# Altium PCB classyTKL_EC.PcbDoc (part 1 of 2)
Units mm, origin at the board's own origin, x right, y up, seen from the top; angles counter-clockwise.
Board outline 346.59 x 122.85 mm, 4 copper layers (Top Layer, Int1, Int2, Bottom Layer), stack 1.369 mm thick; 156 components, 68 nets, 789 pads, 1245 vias.
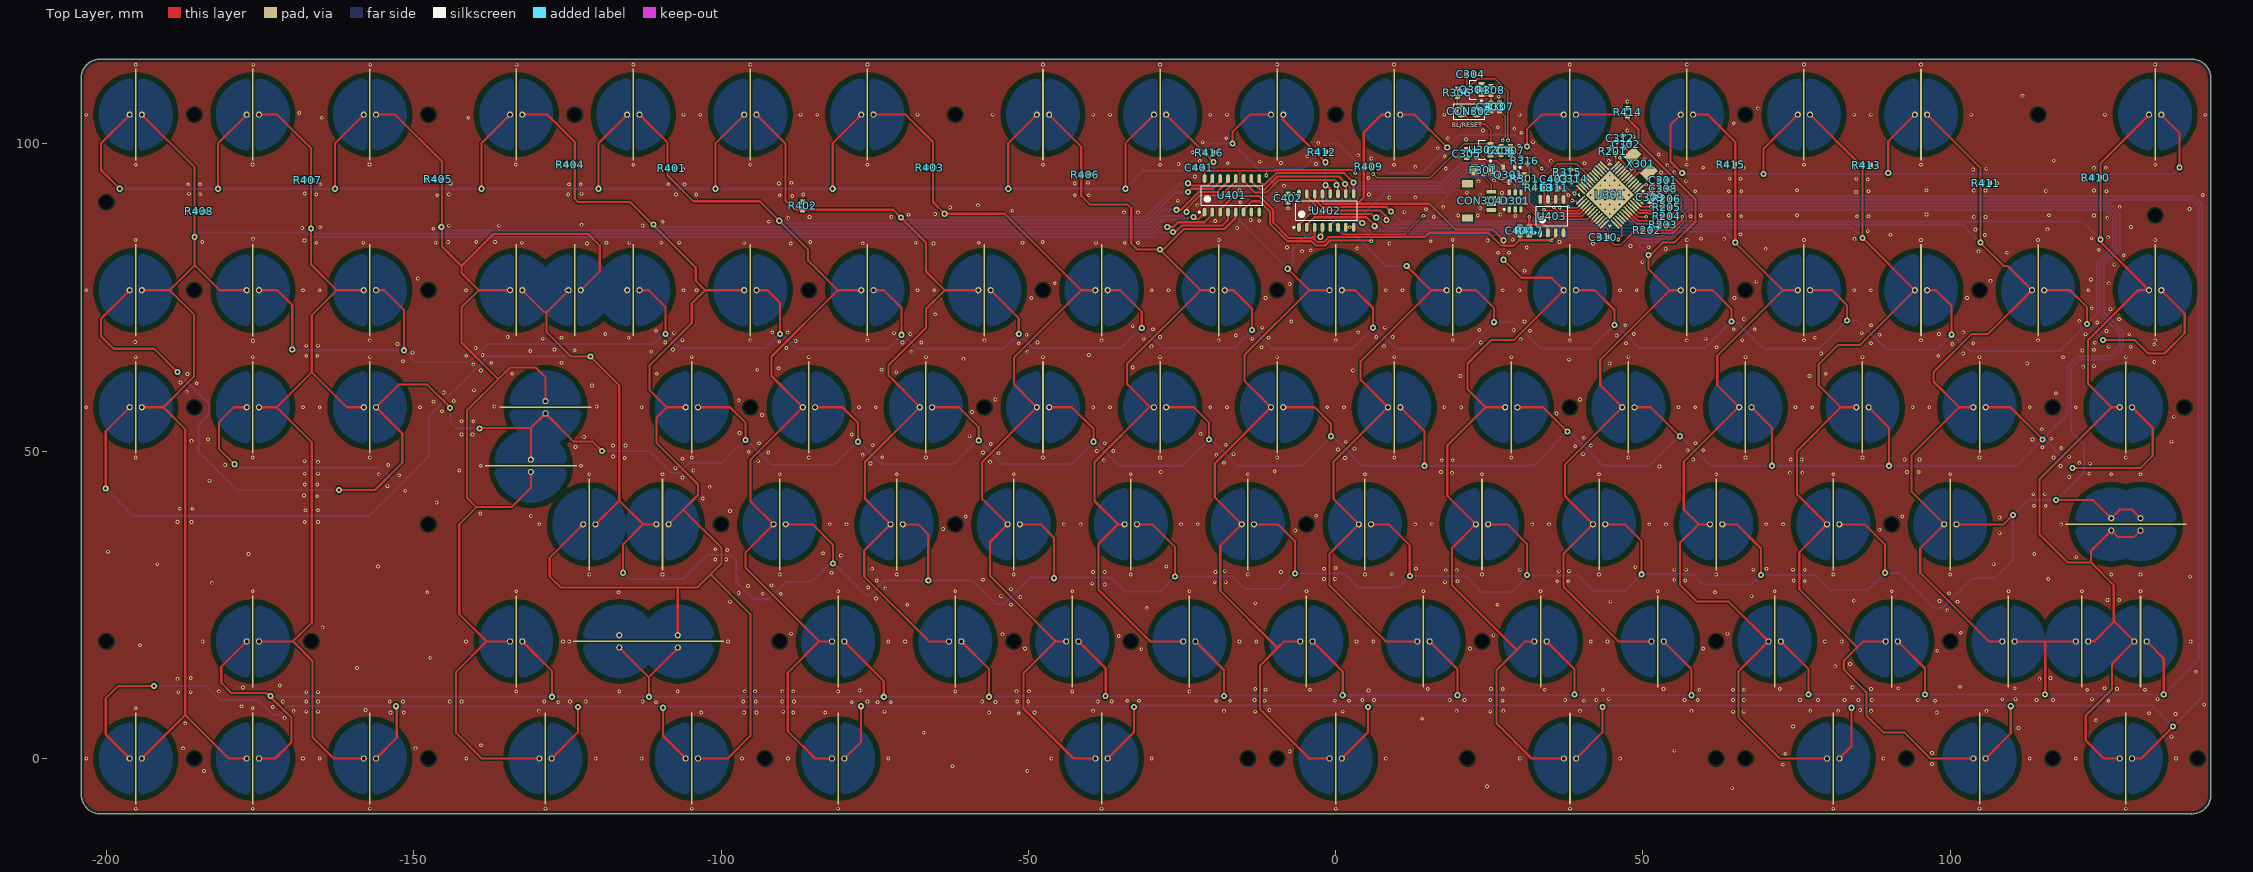
[diagram p0: Top Layer view]
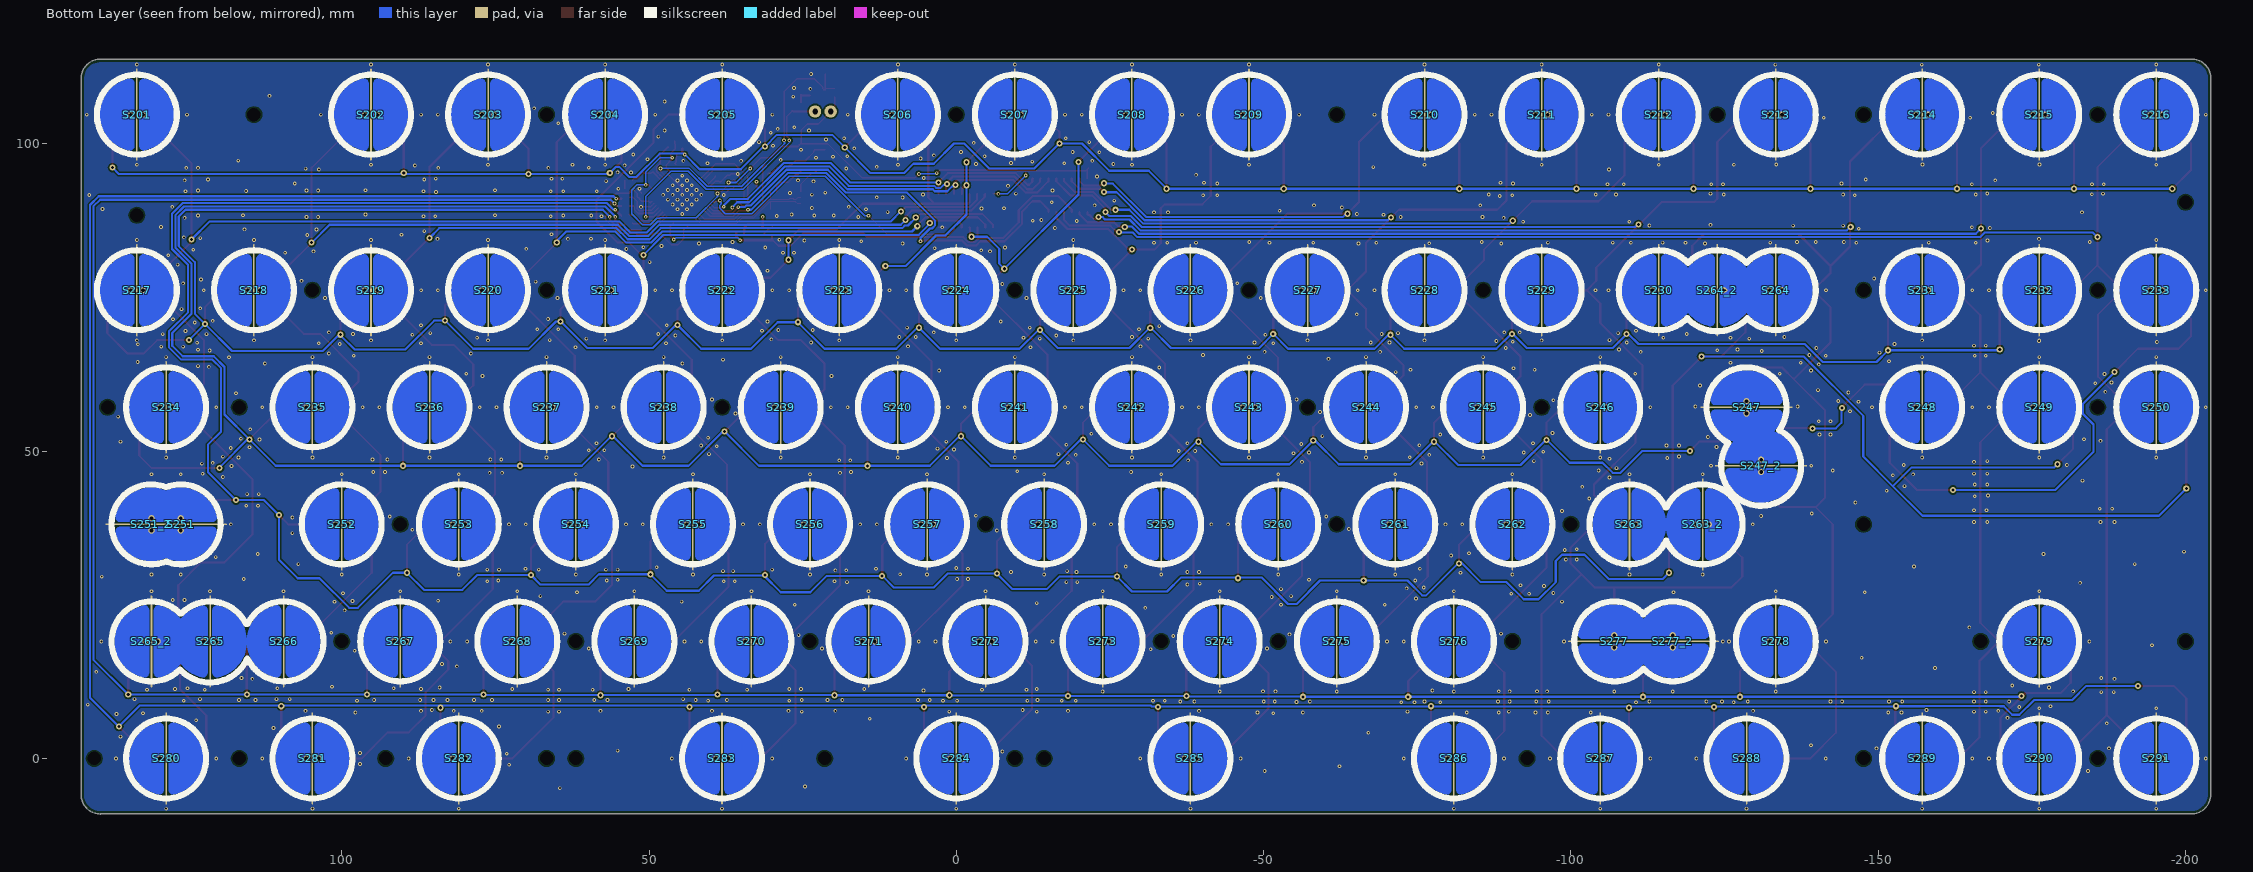
[diagram p1: Bottom Layer view, seen from below]
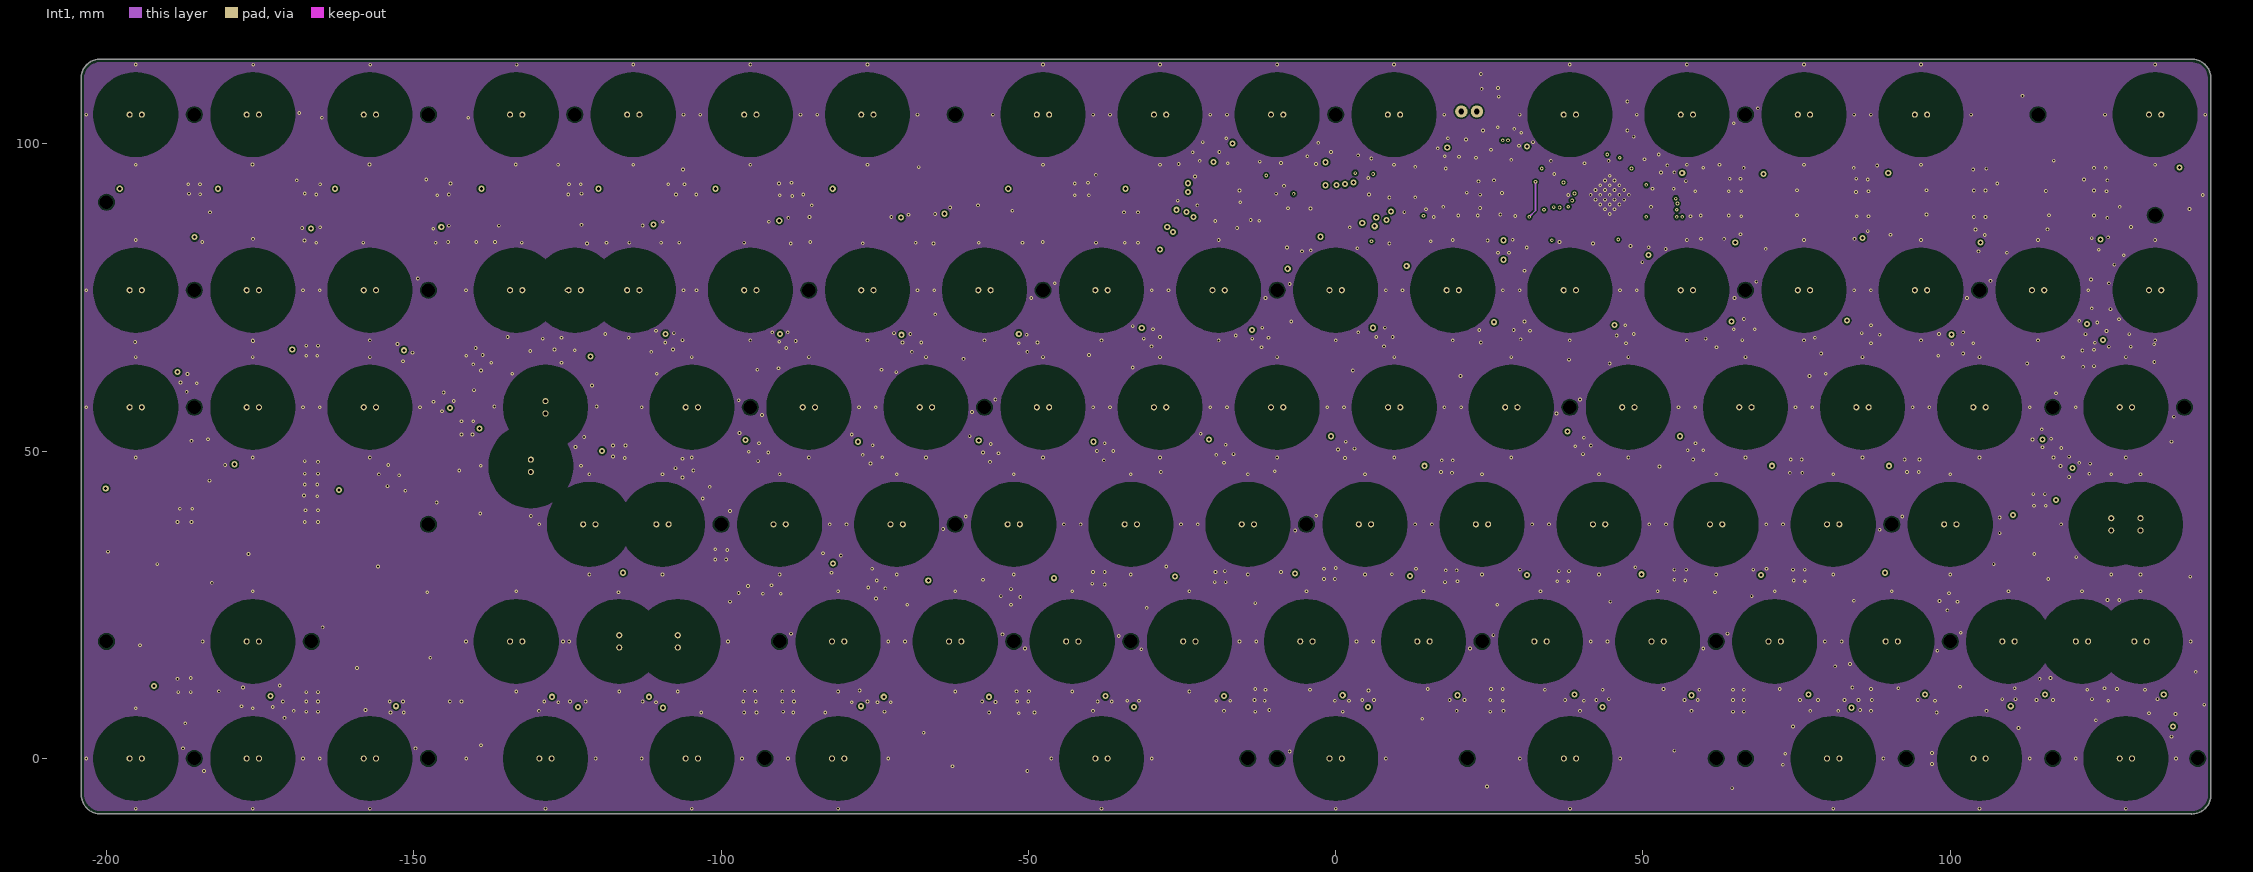
[diagram p2: Int1]
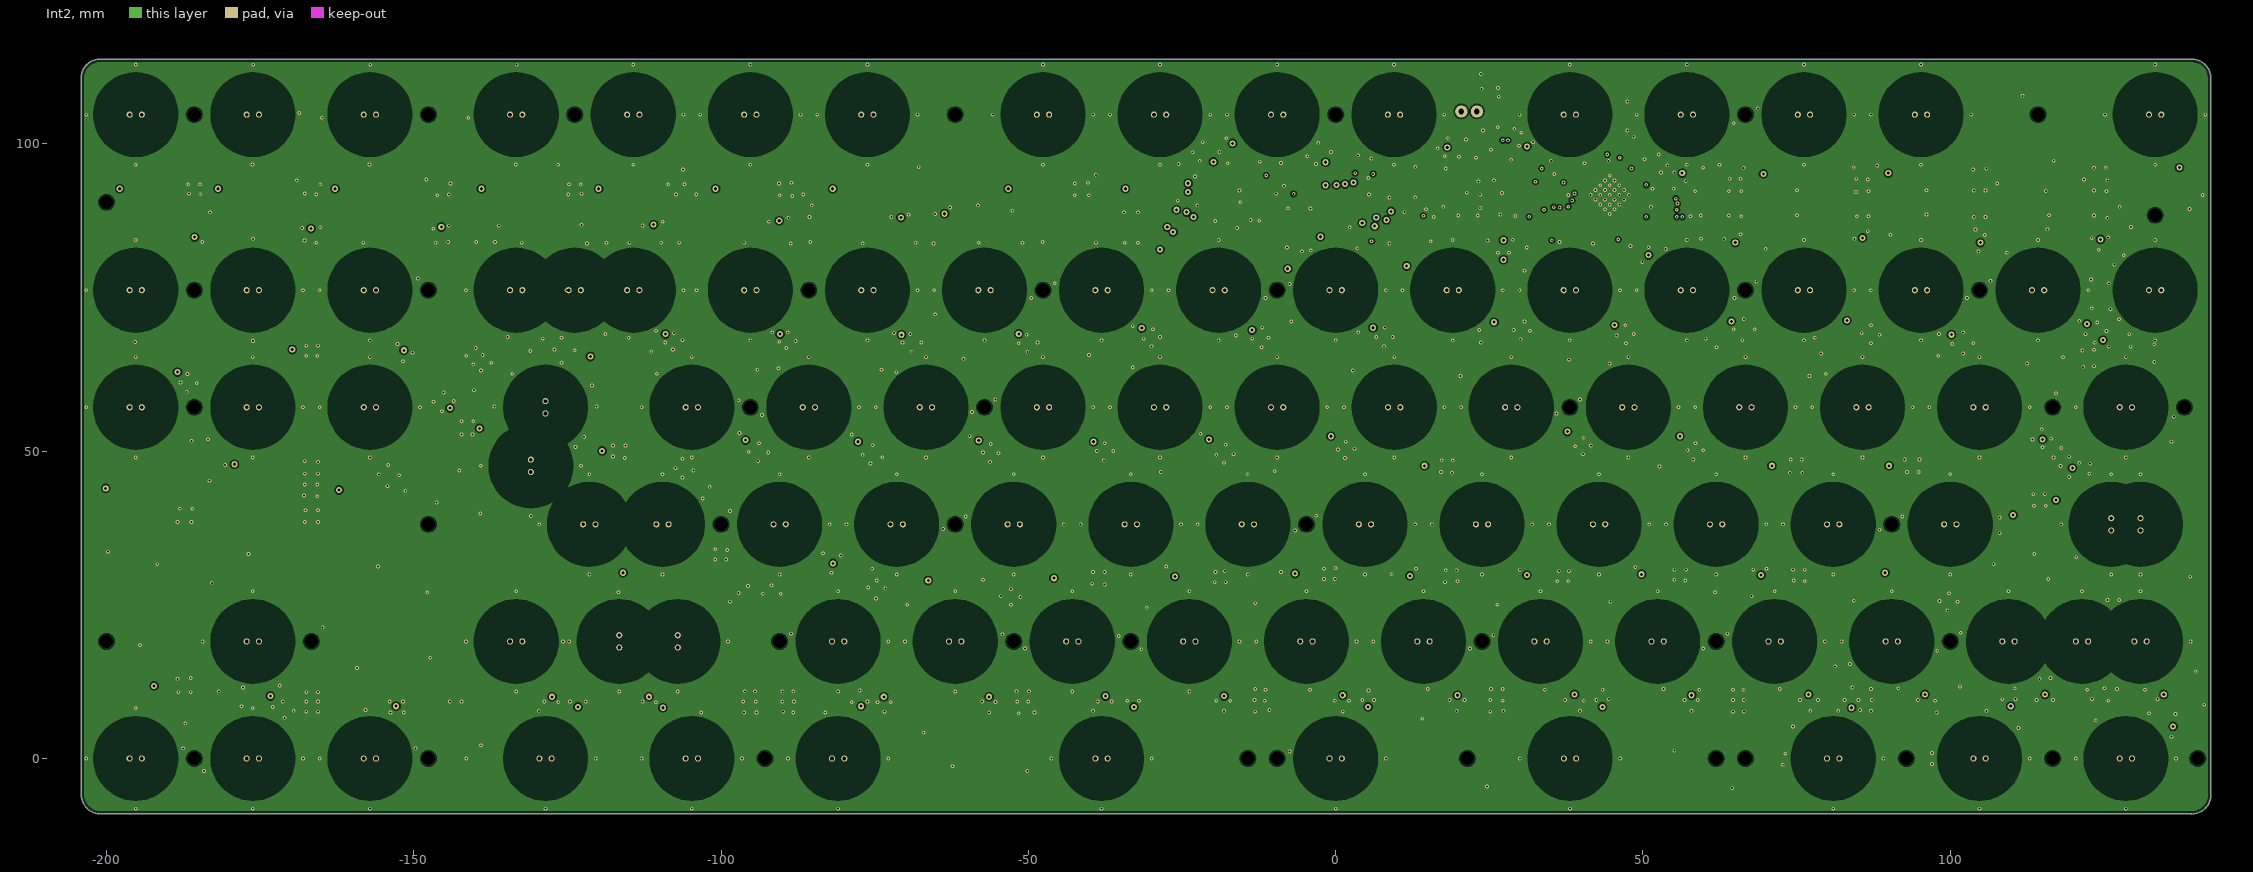
[diagram p3: Int2]

## Layer stack, top to bottom
Top Solder: solder mask 0.0254, SM-001, Dk 4
Top Layer: signal copper 0.035
Dielectric 1: prepreg 0.1295, PP-017, Dk 4.3
Dielectric 2: prepreg 0.1295, PP-017, Dk 4.3
Int1: signal copper 0.035
Dielectric 3: core 0.7112, Core-039, Dk 4.8
Int2: signal copper 0.035
Dielectric 4: prepreg 0.1295, PP-017, Dk 4.3
Dielectric 5: prepreg 0.1295, PP-017, Dk 4.3
Bottom Layer: signal copper 0.035
Bottom Solder: solder mask 0.0254, SM-001, Dk 4

## Board outline
-204.127,-5.981 cw(c-204.032,-5.896) -204.159,-5.896 -204.159,110.685 cw(c-201.032,110.685) -201.032,113.812 cw(c-201.032,113.685) -200.974,113.798 139.295,113.798 cw(c139.295,110.671) 142.423,110.671 142.423,-5.883 cw(c142.299,-5.915) 142.427,-5.915 cw(c139.299,-5.915) 139.299,-9.042 cw(c139.299,-8.915) 139.233,-9.023 -201,-9.023 cw(c-201,-5.896)

## Design rules (kind name [scope] priority, off if disabled: settings)
BoardOutlineClearance [All] p1: gap=0.5 ignorepadtopadclearanceinfootprint=FALSE
Clearance [All] p1: gap=0.2 ignorepadtopadclearanceinfootprint=FALSE except(0: Arc-Hole Track-Hole SMDPad-Hole THPad-Hole Via-Hole Fill-Hole Poly-Hole Region-Hole Text-Hole; 0.254: THPad-THPad THPad-Via THPad-Fill THPad-Poly THPad-Region THPad-Text Via-Via Via-Fill Via-Poly Via-Region Via-Text Fill-Fill Fill-Poly Fill-Region Fill-Text Poly-Poly Poly-Region Poly-Text Region-Region Region-Text Text-Text)
ComponentClearance [InComponent('No Component') And OnLayer('Component Side')] p1: gap=0.254 collisioncheckmode=3 verticalgap=0.254 showdistances=FALSE
DiffPairsRouting DiffPairsRouting_USB [InDifferentialPairClass('All Differential Pairs')] p1: maxlimit=0.254 minlimit=0.203 mostfreqgap=0.203 toplayer_minwidth=0.152 toplayer_maxwidth=0.381 toplayer_prefwidth=0.152 midlayer1_minwidth=0.152 midlayer1_maxwidth=0.381 midlayer1_prefwidth=0.152 midlayer2_minwidth=0.152 midlayer2_maxwidth=0.381 midlayer2_prefwidth=0.152 bottomlayer_minwidth=0.152 bottomlayer_maxwidth=0.381 bottomlayer_prefwidth=0.152 maxuncoupledlength=12.7
DiffPairsRouting [All] p2: maxlimit=0.254 minlimit=0.254 mostfreqgap=0.254 toplayer_minwidth=0.381 toplayer_maxwidth=0.381 toplayer_prefwidth=0.381 midlayer1_minwidth=0.381 midlayer1_maxwidth=0.381 midlayer1_prefwidth=0.381 midlayer2_minwidth=0.381 midlayer2_maxwidth=0.381 midlayer2_prefwidth=0.381 bottomlayer_minwidth=0.381 bottomlayer_maxwidth=0.381 bottomlayer_prefwidth=0.381 maxuncoupledlength=12.7
HoleSize [All] p1: absolutevalues=TRUE maxlimit=20 minlimit=0.025 maxpercent=80.000 minpercent=20.000
MatchedLengths MatchedLengths_USB_DiffPairs_1 [All] p1: tolerance=0.127 checknetsindiffpair=TRUE checkdiffpairvsdiffpair=FALSE checkxsignals=FALSE checkothers=FALSE
MatchedLengths MatchedLengths_USB_DiffPairs [All] p2: tolerance=0.127 checknetsindiffpair=TRUE checkdiffpairvsdiffpair=FALSE checkxsignals=FALSE checkothers=FALSE
PolygonConnect PolygonConnect_1 [All vs IsVia] p1: connectstyle=Direct reliefconductorwidth=0.254 reliefentries=4 polygonreliefangle="90 Angle" airgapwidth=0.254
PolygonConnect [All] p2: connectstyle=Relief reliefconductorwidth=0.254 reliefentries=4 polygonreliefangle="90 Angle" airgapwidth=0.254
RoutingVias [All] p1: holewidth=0.711 width=1.27 viastyle="Through Hole" minholewidth=0.711 minwidth=1.27 maxholewidth=0.711 maxwidth=1.27
SolderMaskExpansion [All] p1: expansion=0.102 istentingtop=FALSE
Width [All] p1: maxlimit=3 minlimit=0.203 preferedwidth=0.254 minimp=50.000000 maximp=50.000000 favimp=50.000000
27 further rules are at their usual default settings.

## Classes and differential pairs
component class 1_classyTKL_EC_top: R201 R202 R203 R204 R205 R206
component class Designator: C201 C202 C203 C204 C205 C206 S201 S202 S203 S204 S205 S206 S207 S208 S209 S210 S211 S212 S213 S214 S215 S216 S217 S218 S219 S220 S221 S222 S223 S224 S225 S226 S227 S228 S229 S230 S231 S232 S233 S234 S235 S236 S237 S238 S239 S240 S241 S242 S243 S244 S245 S246 S247 S247_2 S248 S249 S250 S251 S251_2 S252 S253 S254 S255 S256 S257 S258 S259 S260 S261 S262 S263 S263_2 S264 S264_2 S265 S265_2 S266 S267 S268 S269 S270 S271 S272 S273 S274 S275 S276 S277 S277_2 S278 S279 S280 S281 S282 S283 S284 S285 S286 S287 S288 S289 S290 S291
differential pair D: +D_P -D_N

## Components (designator, comment, footprint, x,y, rotation, side; value= is the part's Value field where it differs from the comment)
C301 "" C0603[1608] 53.34,94.107 r180 top value=30pF
C302 "" C0603[1608] 47.292,99.929 r225 top value=30pF
C303 "" C0603[1608] 25.273,106.045 r90 top value=4.7uF
C304 "" C0603[1608] 21.971,111.379 r0 top value=470nF
C305 "" C0603[1608] 21.336,98.425 r90 top value=1uF
C306 "" C0603[1608] 26.924,98.933 r90 top value=1uF
C307 "" C0603[1608] 28.448,98.933 r90 top value=4,7uF
C308 "" C0603[1608] 53.34,92.71 r180 top value=0.1uF
C309 "" C0603[1608] 51.181,91.313 r270 top value=0.1uF
C310 "" C0603[1608] 43.561,84.836 r0 top value=0.1uF
C311 "" C0603[1608] 35.56,92.837 r180 top value=0.1uF
C312 "" C0603[1608] 46.276,100.945 r225 top value=0.1uF
C314 "" C0603[1608] 38.735,94.361 r45 top value=4,7uF
C401 "" C0603[1608] -22.225,96.139 r0 top value=0.1uF
C402 "" C0603[1608] -7.747,91.186 r90 top value=0.1uF
C403 "" C0603[1608] 35.56,94.234 r180 top value=0.1uF
C404 "" C0603[1608] 29.972,85.852 r270 top value=220pF
CON302 "Header 2" HDR1X2 22.987,105.283 r180 top value=DNP
CON304 "Header 5" "JST SM04B-SRSS-TB" 21.468,93.54 r270 top locked
D301 "SRV05" SOT-23-6 29.215,90.734 r90 top
F301 "Fuse Thermal" C1206[3216] 24.003,95.758 r180 top
Q301 "PMOS-2" SOT-23-3#1 28.194,94.996 r270 top
Q304 "NMOS" SOT-23-3#2 22.536,108.839 r0 top
R201 "Res1" R0603[1608] 45.085,98.806 r135 top value=100R
R202 "Res1" R0603[1608] 50.673,85.979 r0 top value=100R
R203 "Res1" R0603[1608] 53.34,86.868 r0 top value=100R
R204 "Res1" R0603[1608] 53.848,88.265 r0 top value=100R
R205 "Res1" R0603[1608] 53.848,89.662 r0 top value=100R
R206 "Res1" R0603[1608] 53.848,91.059 r0 top value=100R
R301 "Res1" R0603[1608] 30.734,94.361 r270 top value=10K
R306 "Res1" R0603[1608] 19.812,108.331 r90 top value=10K
R307 "Res1" R0603[1608] 26.67,106.045 r90 top value=10K
R308 "Res1" R0603[1608] 25.273,108.727 r90 top value=100K
R315 "Res1" R0603[1608] 37.719,95.377 r225 top value=10K
R316 "Res1" R0603[1608] 30.734,97.282 r315 top value=51K
R401 "Res1" R0603[1608] -108.077,96.012 r0 top value=100K
R402 "Res1" R0603[1608] -86.741,89.916 r90 top value=100K
R403 "Res1" R0603[1608] -66.04,96.139 r180 top value=100K
R404 "Res1" R0603[1608] -124.587,96.647 r180 top value=100K
R405 "Res1" R0603[1608] -146.05,94.234 r180 top value=100K
R406 "Res1" R0603[1608] -40.767,94.996 r0 top value=100K
R407 "Res1" R0603[1608] -167.259,94.107 r180 top value=100K
R408 "Res1" R0603[1608] -184.912,89.027 r0 top value=100K
R409 "Res1" R0603[1608] 5.349,96.266 r0 top value=100K
R410 "Res1" R0603[1608] 123.698,94.488 r180 top value=100K
R411 "Res1" R0603[1608] 105.791,93.599 r0 top value=100K
R412 "Res1" R0603[1608] -2.286,98.679 r0 top value=100K
R413 "Res1" R0603[1608] 86.36,96.52 r0 top value=100K
R414 "Res1" R0603[1608] 47.498,105.156 r90 top value=100K
R415 "Res1" R0603[1608] 64.262,96.647 r180 top value=100K
R416 "Res1" R0603[1608] -20.574,98.552 r0 top value=100K
R417 "Res1" R0603[1608] 31.496,85.852 r270 top value=1K
R418 "Res1" R0603[1608] 33.02,92.837 r0 top value=100K
S201 "SW-PB-3" TOPRE 133.349,104.775 r90 bottom locked value=DNP
S202 "SW-PB-3" TOPRE 95.249,104.775 r270 bottom locked value=DNP
S203 "SW-PB-3" TOPRE 76.199,104.775 r270 bottom locked value=DNP
S204 "SW-PB-3" TOPRE 57.149,104.775 r270 bottom locked value=DNP
S205 "SW-PB-3" TOPRE 38.099,104.775 r270 bottom locked value=DNP
S206 "SW-PB-3" TOPRE 9.494,104.775 r90 bottom locked value=DNP
S207 "SW-PB-3" TOPRE -9.526,104.775 r270 bottom locked value=DNP
S208 "SW-PB-3" TOPRE -28.576,104.775 r270 bottom locked value=DNP
S209 "SW-PB-3" TOPRE -47.626,104.775 r270 bottom locked value=DNP
S210 "SW-PB-3" TOPRE -76.201,104.775 r270 bottom locked value=DNP
S211 "SW-PB-3" TOPRE -95.251,104.775 r270 bottom locked value=DNP
S212 "SW-PB-3" TOPRE -114.301,104.775 r270 bottom locked value=DNP
S213 "SW-PB-3" TOPRE -133.351,104.775 r270 bottom locked value=DNP
S214 "SW-PB-3" TOPRE -157.162,104.775 r270 bottom locked value=DNP
S215 "SW-PB-3" TOPRE -176.213,104.775 r270 bottom locked value=DNP
S216 "SW-PB-3" TOPRE -195.263,104.775 r270 bottom locked value=DNP
S217 "SW-PB-3" TOPRE 133.349,76.2 r90 bottom locked value=DNP
S218 "SW-PB-3" TOPRE 114.299,76.2 r90 bottom locked value=DNP
S219 "SW-PB-3" TOPRE 95.249,76.2 r90 bottom locked value=DNP
S220 "SW-PB-3" TOPRE 76.199,76.2 r90 bottom locked value=DNP
S221 "SW-PB-3" TOPRE 57.149,76.2 r90 bottom locked value=DNP
S222 "SW-PB-3" TOPRE 38.099,76.2 r90 bottom locked value=DNP
S223 "SW-PB-3" TOPRE 19.049,76.2 r90 bottom locked value=DNP
S224 "SW-PB-3" TOPRE -0.001,76.2 r90 bottom locked value=DNP
S225 "SW-PB-3" TOPRE -19.051,76.2 r90 bottom locked value=DNP
S226 "SW-PB-3" TOPRE -38.101,76.2 r90 bottom locked value=DNP
S227 "SW-PB-3" TOPRE -57.151,76.2 r90 bottom locked value=DNP
S228 "SW-PB-3" TOPRE -76.201,76.2 r90 bottom locked value=DNP
S229 "SW-PB-3" TOPRE -95.251,76.2 r90 bottom locked value=DNP
S230 "SW-PB-3" TOPRE -114.301,76.2 r90 bottom locked value=DNP
S231 "SW-PB-3" TOPRE -157.162,76.2 r90 bottom locked value=DNP
S232 "SW-PB-3" TOPRE -176.213,76.2 r90 bottom locked value=DNP
S233 "SW-PB-3" TOPRE -195.263,76.2 r270 bottom locked value=DNP
S234 "SW-PB-3" TOPRE 128.587,57.15 r90 bottom locked value=DNP
S235 "SW-PB-3" TOPRE 104.774,57.15 r90 bottom locked value=DNP
S236 "SW-PB-3" TOPRE 85.724,57.15 r90 bottom locked value=DNP
S237 "SW-PB-3" TOPRE 66.674,57.15 r90 bottom locked value=DNP
S238 "SW-PB-3" TOPRE 47.624,57.15 r90 bottom locked value=DNP
S239 "SW-PB-3" TOPRE 28.574,57.15 r90 bottom locked value=DNP
S240 "SW-PB-3" TOPRE 9.524,57.15 r90 bottom locked value=DNP
S241 "SW-PB-3" TOPRE -9.526,57.15 r90 bottom locked value=DNP
S242 "SW-PB-3" TOPRE -28.576,57.15 r90 bottom locked value=DNP
S243 "SW-PB-3" TOPRE -47.626,57.15 r90 bottom locked value=DNP
S244 "SW-PB-3" TOPRE -66.676,57.15 r90 bottom locked value=DNP
S245 "SW-PB-3" TOPRE -85.726,57.15 r90 bottom locked value=DNP
S246 "SW-PB-3" TOPRE -104.776,57.15 r90 bottom locked value=DNP
S247 "SW-PB-3" TOPRE -128.588,57.15 r0 bottom locked value=DNP
S247_2 "SW-PB-3" TOPRE -130.969,47.625 r180 bottom locked value=DNP
S248 "SW-PB-3" TOPRE -157.162,57.15 r90 bottom locked value=DNP
S249 "SW-PB-3" TOPRE -176.213,57.15 r270 bottom locked value=DNP
S250 "SW-PB-3" TOPRE -195.263,57.15 r270 bottom locked value=DNP
S251 "SW-PB-3" TOPRE 126.206,38.1 r180 bottom locked value=DNP
S251_2 "SW-PB-3" TOPRE 130.968,38.1 r180 bottom locked value=DNP
S252 "SW-PB-3" TOPRE 100.012,38.1 r90 bottom locked value=DNP
S253 "SW-PB-3" TOPRE 80.962,38.1 r90 bottom locked value=DNP
S254 "SW-PB-3" TOPRE 61.912,38.1 r90 bottom locked value=DNP
S255 "SW-PB-3" TOPRE 42.862,38.1 r90 bottom locked value=DNP
S256 "SW-PB-3" TOPRE 23.812,38.1 r90 bottom locked value=DNP
S257 "SW-PB-3" TOPRE 4.762,38.1 r90 bottom locked value=DNP
S258 "SW-PB-3" TOPRE -14.288,38.1 r90 bottom locked value=DNP
S259 "SW-PB-3" TOPRE -33.338,38.1 r90 bottom locked value=DNP
S260 "SW-PB-3" TOPRE -52.388,38.1 r90 bottom locked value=DNP
S261 "SW-PB-3" TOPRE -71.438,38.1 r90 bottom locked value=DNP
S262 "SW-PB-3" TOPRE -90.488,38.1 r90 bottom locked value=DNP
S263 "SW-PB-3" TOPRE -109.544,38.1 r270 bottom locked value=DNP
S263_2 "SW-PB-3" TOPRE -121.451,38.1 r90 bottom locked value=DNP
S264 "SW-PB-3" TOPRE -133.351,76.2 r90 bottom locked value=DNP
S264_2 "SW-PB-3" TOPRE -123.826,76.2 r270 bottom locked value=DNP
S265 "SW-PB-3" TOPRE 121.443,19.05 r270 bottom locked value=DNP
S265_2 "SW-PB-3" TOPRE 130.968,19.05 r90 bottom locked value=DNP
S266 "SW-PB-3" TOPRE 109.479,19.05 r90 bottom locked value=DNP
S267 "SW-PB-3" TOPRE 90.487,19.05 r90 bottom locked value=DNP
S268 "SW-PB-3" TOPRE 71.437,19.05 r90 bottom locked value=DNP
S269 "SW-PB-3" TOPRE 52.387,19.05 r90 bottom locked value=DNP
S270 "SW-PB-3" TOPRE 33.337,19.05 r90 bottom locked value=DNP
S271 "SW-PB-3" TOPRE 14.287,19.05 r90 bottom locked value=DNP
S272 "SW-PB-3" TOPRE -4.763,19.05 r90 bottom locked value=DNP
S273 "SW-PB-3" TOPRE -23.813,19.05 r90 bottom locked value=DNP
S274 "SW-PB-3" TOPRE -42.862,19.05 r90 bottom locked value=DNP
S275 "SW-PB-3" TOPRE -61.913,19.05 r90 bottom locked value=DNP
S276 "SW-PB-3" TOPRE -80.963,19.05 r90 bottom locked value=DNP
S277 "SW-PB-3" TOPRE -107.056,19.05 r0 bottom locked value=DNP
S277_2 "SW-PB-3" TOPRE -116.581,19.05 r0 bottom locked value=DNP
S278 "SW-PB-3" TOPRE -133.351,19.05 r90 bottom locked value=DNP
S279 "SW-PB-3" TOPRE -176.213,19.05 r270 bottom locked value=DNP
S280 "SW-PB-3" TOPRE 128.587,0 r90 bottom locked value=DNP
S281 "SW-PB-3" TOPRE 104.775,0 r90 bottom locked value=DNP
S282 "SW-PB-3" TOPRE 80.962,0 r90 bottom locked value=DNP
S283 "SW-PB-3" TOPRE 38.132,0 r90 bottom locked value=DNP
S284 "SW-PB-3" TOPRE 0,0 r90 bottom locked value=DNP
S285 "SW-PB-3" TOPRE -38.1,0 r90 bottom locked value=DNP
S286 "SW-PB-3" TOPRE -80.962,0 r90 bottom locked value=DNP
S287 "SW-PB-3" TOPRE -104.775,0 r270 bottom locked value=DNP
S288 "SW-PB-3" TOPRE -128.588,0 r90 bottom locked value=DNP
S289 "SW-PB-3" TOPRE -157.163,0 r90 bottom locked value=DNP
S290 "SW-PB-3" TOPRE -176.213,0 r90 bottom locked value=DNP
S291 "SW-PB-3" TOPRE -195.263,0 r270 bottom locked value=DNP
U301 "STM32F4 - 48PIN" "STM32 - COMBO 7X7MM" 44.604,91.715 r135 top
U302 "XC6206P332MR" SOT-23-3#2 24.003,99.06 r0 top
U401 "74HC4051" Texas_Instruments_D_SOIC16 -16.891,91.636 r90 top
U402 "74HC4051" Texas_Instruments_D_SOIC16 -1.524,89.154 r90 top
U403 "OPA350" SOIC-8 35.179,88.265 r0 top
X301 "XTAL" "CTS 445-series crystal" 49.657,96.774 r135 top value=8MHz

## Footprints (in the part's own frame and the unit in brackets; to place one, negate y for a bottom-side part, rotate by r counter-clockwise, add the part's x,y. Pads: shape width x height; smd on the part's side, far side on the other; paste and mask are expansions set on the pad)
C0603[1608] [mm] "Chip Resistor, 2-Leads, Body 1,57x0,80mm, IPC Medium Density"
  rect 0.8x0.85 smd: 1(-0.65,0) 2(0.65,0)
  body extent -0.83,-0.43 0.82,0.43, height 0.5
C1206[3216] [mm]
  rect 1.2x1.8 smd: 1(-1.35,0) 2(1.35,0)
  silkscreen extent -0.35,-0.8 0.35,0.8, body extent -1.6,-0.9 1.6,0.9, height 1.2
"CTS 445-series crystal" [mm]
  rect 1.8x2.4 smd: 1(-1.9,0) 2(1.9,0)
  body extent -2.5,-1.6 2.5,1.6, height 1.3
HDR1X2 [mm] "Connector; Header; 2 Position"
  round 2 hole 0.9 mask+0.102: 1(0,0) 2(2.54,0)
  silkscreen extent -1.27,-1.27 3.81,1.27
"JST SM04B-SRSS-TB" [mm]
  rect 0.6x1.55 smd: 1(1.3,3.875) 2(2.3,3.875) 3(3.3,3.875) 4(4.3,3.875)
  rect 1.2x1.8 smd: 5(0,0) 5(5.6,0)
  body extent -0.21,-0.76 5.79,4.19, height 3.25
R0603[1608] [mm] "Chip Resistor, 2-Leads, Body 1,57x0,80mm, IPC Medium Density"
  rect 0.8x0.85 smd: 1(-0.65,0) 2(0.65,0)
  body extent -0.83,-0.43 0.82,0.43, height 0.5
SOIC-8 [mm] "Based on AT24C256C datasheet"
  oval 0.6x1.45 smd: 1(-1.905,-2.725) 2(-0.635,-2.725) 3(0.635,-2.725) 4(1.905,-2.725) 5(1.905,2.725) 6(0.635,2.725) 7(-0.635,2.725) 8(-1.905,2.725)
  silkscreen extent -2.88,-2.85 2.55,1.6, body extent -2.55,-3 2.55,3, height 1.75
SOT-23-3#1 [mm] "3.3v regulator, used in Windsond S2 proto 1"
  rect 1x0.55 smd: 1(-1.2,0.95) 2(-1.2,-0.95) 3(1.2,0)
  silkscreen extent -1.32,-1.55 0.7,1.95, body extent -1.45,-1.5 1.1,1.5, height 1
SOT-23-3#2 [mm] "3.3v regulator, used in Windsond S2 proto 1"
  rect 1x0.55 smd: 1(1.2,-0.95) 2(1.2,0.95) 3(-1.2,0)
  silkscreen extent -0.7,-1.95 1.33,1.55, body extent -1.1,-1.5 1.45,1.5, height 1
SOT-23-6 [mm]
  rect 1x0.55 smd: 1(-1.375,0.95) 2(-1.375,0) 3(-1.375,-0.95) 4(1.375,-0.95) 5(1.375,0) 6(1.375,0.95)
  silkscreen extent -1.5,-1.55 0.46,1.92, body extent -1.37,-1.44 1.47,1.49, height 1.05
"STM32 - COMBO 7X7MM" [mm] "LQFP48, 7x7mm"
  oval 0.3x1.45 smd paste-5: 1(-2.75,-4.225) 2(-2.25,-4.225) 3(-1.75,-4.225) 4(-1.25,-4.225) 5(-0.75,-4.225) 6(-0.25,-4.225) 7(0.25,-4.225) 8(0.75,-4.225) 9(1.25,-4.225) 10(1.75,-4.225) 11(2.25,-4.225) 12(2.75,-4.225) 25(2.75,4.225) 26(2.25,4.225) 27(1.75,4.225) 28(1.25,4.225) 29(0.75,4.225) 30(0.25,4.225) 31(-0.25,4.225) 32(-0.75,4.225) 33(-1.25,4.225) 34(-1.75,4.225) 35(-2.25,4.225) 36(-2.75,4.225)
  oval 0.25x0.8 smd: 1(-2.75,-3.4) 2(-2.25,-3.4) 3(-1.75,-3.4) 4(-1.25,-3.4) 5(-0.75,-3.4) 6(-0.25,-3.4) 7(0.25,-3.4) 8(0.75,-3.4) 9(1.25,-3.4) 10(1.75,-3.4) 11(2.25,-3.4) 12(2.75,-3.4) 25(2.75,3.4) 26(2.25,3.4) 27(1.75,3.4) 28(1.25,3.4) 29(0.75,3.4) 30(0.25,3.4) 31(-0.25,3.4) 32(-0.75,3.4) 33(-1.25,3.4) 34(-1.75,3.4) 35(-2.25,3.4) 36(-2.75,3.4)
  oval 0.8x0.25 smd: 13(3.4,-2.75) 14(3.4,-2.25) 15(3.4,-1.75) 16(3.4,-1.25) 17(3.4,-0.75) 18(3.4,-0.25) 19(3.4,0.25) 20(3.4,0.75) 21(3.4,1.25) 22(3.4,1.75) 23(3.4,2.25) 24(3.4,2.75) 37(-3.4,2.75) 38(-3.4,2.25) 39(-3.4,1.75) 40(-3.4,1.25) 41(-3.4,0.75) 42(-3.4,0.25) 43(-3.4,-0.25) 44(-3.4,-0.75) 45(-3.4,-1.25) 46(-3.4,-1.75) 47(-3.4,-2.25) 48(-3.4,-2.75)
  oval 1.45x0.3 smd paste-5: 13(4.225,-2.75) 14(4.225,-2.25) 15(4.225,-1.75) 16(4.225,-1.25) 17(4.225,-0.75) 18(4.225,-0.25) 19(4.225,0.25) 20(4.225,0.75) 21(4.225,1.25) 22(4.225,1.75) 23(4.225,2.25) 24(4.225,2.75) 37(-4.225,2.75) 38(-4.225,2.25) 39(-4.225,1.75) 40(-4.225,1.25) 41(-4.225,0.75) 42(-4.225,0.25) 43(-4.225,-0.25) 44(-4.225,-0.75) 45(-4.225,-1.25) 46(-4.225,-1.75) 47(-4.225,-2.25) 48(-4.225,-2.75)
  rect 5.6x5.6 smd: 47(0,0)
  silkscreen extent -3.65,-4.35 3.65,3.65, body extent -4.5,-4.5 4.5,4.5, height 1.5
Texas_Instruments_D_SOIC16 [mm]
  oval 1.45x0.6 smd: 1(-2.725,4.445) 2(-2.725,3.175) 3(-2.725,1.905) 4(-2.725,0.635) 5(-2.725,-0.635) 6(-2.725,-1.905) 7(-2.725,-3.175) 8(-2.725,-4.445) 9(2.725,-4.445) 10(2.725,-3.175) 11(2.725,-1.905) 12(2.725,-0.635) 13(2.725,0.635) 14(2.725,1.905) 15(2.725,3.175) 16(2.725,4.445)
  silkscreen extent -2.85,-5 1.6,5.42, body extent -3,-5 3,5, height 1.75
TOPRE [mm]
  round 1 hole 0.6 mask+0: 1(0,1) 2(0,-1)
  oval 15x0.25 smd far side paste-1 mask+0: 3(0,0)
  oval 15x0.25 smd paste-1 mask+0: 3(0,0)
  round 1 on Mech14: ""(0,0)
  Top Layer region: -5.259,0.414 -5.17,0.398 -5.08,0.393 -5.08,0.393 5.08,0.393 5.17,0.398 5.259,0.414 5.259,0.414 5.568,0.556 5.782,0.819 5.859,1.149 5.859,1.149 5.854,1.232 5.841,1.314 5.841,1.314 4.688,3.723 2.603,5.391 0,5.987 -2.603,5.391 -4.688,3.723 -5.841,1.314 -5.841,1.314 -5.847,1.018 -5.739,0.742 -5.532,0.53 -5.259,0.414
  Top Layer region: -5.841,-1.314 -4.688,-3.723 -2.603,-5.391 0,-5.987 2.603,-5.391 4.688,-3.723 5.841,-1.314 5.841,-1.314 5.854,-1.232 5.859,-1.149 5.859,-1.149 5.782,-0.819 5.568,-0.556 5.259,-0.414 5.259,-0.414 5.17,-0.398 5.08,-0.393 5.08,-0.393 -5.08,-0.393 -5.17,-0.398 -5.259,-0.414 -5.259,-0.414 -5.532,-0.53 -5.739,-0.742 -5.847,-1.018 -5.841,-1.314
  Top Layer pour cut-out: 0,-6.884 -2.634,-6.36 -4.868,-4.868 -6.36,-2.634 -6.884,0 -6.884,0 -6.36,2.634 -4.868,4.868 -2.634,6.36 0,6.884 0,6.884 2.634,6.36 4.868,4.868 6.36,2.634 6.884,0 6.884,0 6.36,-2.634 4.868,-4.868 2.634,-6.36 0,-6.884
  Int1 pour cut-out: 0,-6.884 -2.634,-6.36 -4.868,-4.868 -6.36,-2.634 -6.884,0 -6.884,0 -6.36,2.634 -4.868,4.868 -2.634,6.36 0,6.884 0,6.884 2.634,6.36 4.868,4.868 6.36,2.634 6.884,0 6.884,0 6.36,-2.634 4.868,-4.868 2.634,-6.36 0,-6.884
  Int2 pour cut-out: 0,-6.884 -2.634,-6.36 -4.868,-4.868 -6.36,-2.634 -6.884,0 -6.884,0 -6.36,2.634 -4.868,4.868 -2.634,6.36 0,6.884 0,6.884 2.634,6.36 4.868,4.868 6.36,2.634 6.884,0 6.884,0 6.36,-2.634 4.868,-4.868 2.634,-6.36 0,-6.884
  Bottom Layer pour cut-out: 0,-6.884 -2.634,-6.36 -4.868,-4.868 -6.36,-2.634 -6.884,0 -6.884,0 -6.36,2.634 -4.868,4.868 -2.634,6.36 0,6.884 0,6.884 2.634,6.36 4.868,4.868 6.36,2.634 6.884,0 6.884,0 6.36,-2.634 4.868,-4.868 2.634,-6.36 0,-6.884
  Bottom Layer pour cut-out: -6.51,0 -6.015,-2.487 -4.606,-4.596 -2.497,-6.005 -0.01,-6.5 -0.01,-6.5 2.477,-6.005 4.586,-4.596 5.995,-2.487 6.49,0 6.49,0 5.995,2.487 4.586,4.596 2.477,6.005 -0.01,6.5 -0.01,6.5 -2.497,6.005 -4.606,4.596 -6.015,2.487 -6.51,0
  silkscreen extent -6.5,-6.5 6.5,6.5

## Part data
C301 C302: library part Cap, "Capacitor", LCSC MFG="Samsung Electro-Mechanics", LCSC Part #=C22397, MRF.Part=CL10C300JB8NNNC, Version="0603 imperial"
C303 C307 C314: library part Cap, "Capacitor", LCSC MFG="Samsung Electro-Mechanics", LCSC Part #=C19666, MRF.Part=CL10A475KO8NNNC, Version="0603 imperial"
C304 C308 C309 C310 C311 C312 C401 C402 C403: library part Cap, "Capacitor", LCSC MFG=YAGEO, LCSC Part #=C14663, MRF.Part=CC0603KRX7R9BB104, Version="0603 imperial"
C305 C306: library part Cap, "Capacitor", LCSC MFG="Samsung Electro-Mechanics", LCSC Part #=C15849, MRF.Part=CL10A105KB8NNNC, Version="0603 imperial"
C404: library part Cap, "Capacitor", LCSC MFG="Samsung Electro-Mechanics", LCSC Part #=C1603, MRF.Part=CL10B221KB8NNNC, Version="0603 imperial"
CON302: "Header, 2-Pin", LCSC MFG=DNP
CON304: "JST for USB daughter board", LCSC MFG="JST Sales America", LCSC Part #=C160404, MRF.Part=SM04B-SRSS-TB(LF)(SN)
D301: LCSC MFG="ProTek Devices", LCSC Part #=C85364, MRF.Part=SRV05-4-P-T7
F301: "Thermal Fuse", LCSC MFG="Shenzhen JDT Fuse", LCSC Part #=C135338, MRF.Part=ASMD1206-050
Q301: "P-Channel Power MOSFET", LCSC MFG="Vishay Intertech", LCSC Part #=C10487, MRF.Part=SI2301CDS-T1-GE3, Version=SOT23-3
Q304: library part MOSFET-N, "N-Channel MOSFET", LCSC MFG="Changjiang Electronics Tech (CJ)", LCSC Part #=C8545, MRF.Part=2N7002
R201 R202 R203 R204 R205 R206 R308 R401 R402 R403 R404 R405 R406 R407 R408 R409 R410 R411 R412 R413 R414 R415 R416 R418: "Resistor", LCSC MFG="Uniroyal Elec", LCSC Part #=C25803, MRF.Part=0603WAF1003T5E, Version="0603 imperial"
R301 R306 R307 R315: "Resistor", LCSC MFG="Uniroyal Elec", LCSC Part #=C25804, MRF.Part=0603WAF1002T5E, Version="0603 imperial"
R316: "Resistor", LCSC MFG="UNI-ROYAL(Uniroyal Elec)", LCSC Part #=C23196, MRF.Part=0603WAF5102T5E, Version="0603 imperial"
R417: "Resistor", LCSC MFG="UNI-ROYAL(Uniroyal Elec)", LCSC Part #=C21190, MRF.Part=0603WAF1001T5E, Version="0603 imperial"
S201 S202 S203 S204 S205 S206 S207 S208 S209 S210 S211 S212 S213 S214 S215 S216 S217 S218 S219 S220 S221 S222 S223 S224 S225 S226 S227 S228 S229 S230 S231 S232 S233 S234 S235 S236 S237 S238 S239 S240 S241 S242 S243 S244 S245 S246 S247 S247_2 S248 S249 S250 S251 S251_2 S252 S253 S254 S255 S256 S257 S258 S259 S260 S261 S262 S263 S263_2 S264 S264_2 S265 S265_2 S266 S267 S268 S269 S270 S271 S272 S273 S274 S275 S276 S277 S277_2 S278 S279 S280 S281 S282 S283 S284 S285 S286 S287 S288 S289 S290 S291: "Switch", LCSC MFG=DNP
U301: LCSC MFG=STMicroelectronics, LCSC Part #=C60420, MRF.Part=STM32F411CEU6
U302: library part "SOT23 LDO", LCSC MFG="Torex Semicon", LCSC Part #=C5446, MRF.Part=XC6206P332MR
U401 U402: LCSC MFG=Nexperia, LCSC Part #=C9386, MRF.Part=74HC4051D,653
U403: LCSC MFG="Texas Instruments", LCSC Part #=C13388, MRF.Part=OPA350UA/2K5
X301: "Crystal Oscillator", LCSC MFG="Yangxing Tech", LCSC Part #=C115962, MRF.Part=X50328MSB2GI, Version=SMD-5032_2P

## Free pads (board coordinates)
  round 1.152 hole 2.2 unplated paste+0.148 mask+0.148: ""(-200.027,19.05) ""(-200.025,90.505) ""(-185.739,0) ""(-185.739,57.15) ""(-185.739,76.2) ""(-185.737,104.775) ""(-166.689,19.05) ""(-147.639,0) ""(-147.638,76.2) ""(-147.638,104.775) ""(-147.638,38.1) ""(-123.826,104.775) ""(-100.014,38.1) ""(-95.251,57.15) ""(-92.87,0) ""(-90.489,19.05) ""(-85.726,76.2) ""(-61.914,38.1) ""(-61.914,104.775) ""(-57.151,57.15) ""(-52.388,19.05) ""(-47.626,76.2) ""(-33.338,19.05) ""(-14.288,0) ""(-9.526,0) ""(-9.526,76.2) ""(-4.763,38.1) ""(-0.001,104.775) ""(21.431,0) ""(23.812,19.05) ""(38.1,57.15) ""(61.912,0) ""(61.912,19.05) ""(66.674,104.775) ""(66.675,0) ""(66.675,76.2) ""(90.487,38.1) ""(92.869,0) ""(100.012,19.05) ""(104.775,76.2) ""(114.3,104.775) ""(116.681,57.15) ""(116.681,0) ""(133.349,88.392) ""(138.111,57.15) ""(140.275,0)

## Via types
v1: diameter 0.6, hole 0.3, Top Layer to Bottom Layer, tented both sides, 1092 vias
v2: diameter 1, hole 0.5, Top Layer to Bottom Layer, tented both sides, 128 vias
v3: diameter 0.6, hole 0.3, Top Layer to Bottom Layer, tented bottom, 25 vias

## Nets (pads, with @x,y where several pads share a name; then routed paths per layer and width w, separated by ;. In a path a pad name is that pad's centre, name@x,y a point inside that pad or via, vN(x,y) a via of type N, cw(c..) or ccw(c..) an arc to the next point about the centre after c; other vN are vias at no path point)
BOOT0: C303.1 CON302.1 R307.1 U301.44 | length 44.9
  Top Layer w0.254: CON302.1@22.987,105.283 26.558,105.283 R307.1@26.67,105.395 26.695,105.395 26.968,105.122 26.968,105.097 27.578,104.487 27.578,101.238 27.244,100.904 27.244,100.65 v1(27.178,100.584) ; U301.44@48.122,89.258 49.242,88.138 v1(50.546,88.138)
  Bottom Layer w0.254: v1@27.051,100.323 34.729,92.645 40.709,92.645 43.622,95.558 46.428,95.558 50.546,91.44 v1(50.546,88.138)
col1: R410.1 S201.2 S217.2 S234.2 S251.2 S251_2.2 S265.2 S265_2.2 S280.2 U402.14 | length 290.8
  Top Layer w0.35: U402.14@-3.429,91.879 -3.381,91.831 -3.381,90.914 -3.097,90.629 -2.196,89.729 8.269,89.729 8.971,89.027 v2(9.017,89.027) ; S265.2@122.443,19.05 122.469,19.075 123.468,19.075 126.619,22.226 126.619,22.399 ; S280.2@127.587,0 124.968,0 122.047,2.921 122.047,6.985 126.34,11.278 126.34,15.422 S265_2.2@129.968,19.05 126.619,22.399 ; S234.2@127.587,57.15 126.238,57.15 ; S251_2.2@130.968,37.1 129.936,36.068 127.238,36.068 S251.2@126.206,37.1 122.936,33.83 122.936,31.877 ; S201.2@132.349,104.775 124.46,96.886 v2(124.46,84.455) 124.584,84.331 124.584,83.965 S217.2@132.349,76.2 130.556,76.2 122.428,68.072 122.428,60.96 126.238,57.15 ; 122.936,31.877 126.619,28.194 126.619,22.399 ; 122.936,31.877 119.126,31.877 114.554,36.449 114.554,45.466 126.238,57.15
  Bottom Layer w0.35: v2(9.017,89.027) 10.641,87.403 48.55,87.403 50.356,85.597 53.038,85.597 54.844,87.403 121.512,87.403 v2(124.46,84.455)
col2: R411.1 S202.2 S218.2 S235.2 S252.2 S266.2 U402.15 | length 234.6
  Top Layer w0.35: U402.15@-4.699,91.879 -4.617,91.797 -4.617,91.372 -2.424,89.179 7.23,89.179 8.297,88.112 8.297,87.656 v2@8.009,87.368 ; S202.2@96.25,104.775 104.902,96.123 v2(104.902,83.947) 108.713,80.136 109.364,80.136 S218.2@113.299,76.2 106.187,69.088 103.505,69.088 97.282,62.865 97.282,61.341 101.473,57.15 ; S235.2@103.774,57.15 101.473,57.15 ; S266.2@108.479,19.05 106.299,19.05 95.123,30.226 95.123,34.211 S252.2@99.012,38.1 93.726,43.386 93.726,49.403 101.473,57.15
  Bottom Layer w0.35: v2(8.255,87.63) 9.032,86.853 48.322,86.853 50.128,85.047 53.265,85.047 55.071,86.853 101.996,86.853 v2(104.902,83.947)
col3: R413.1 S203.2 S219.2 S236.2 S253.2 S267.2 S281.2 U402.1 | length 251.9
  Top Layer w0.35: U402.1@-5.969,86.429 -5.969,86.854 -4.194,88.629 5.81,88.629 6.428,88.011 v2(6.604,88.011) ; S203.2@77.2,104.775 85.725,96.25 85.725,84.724 S219.2@94.249,76.2 85.359,67.31 81.788,67.31 78.613,64.135 78.613,60.734 82.197,57.15 ; S236.2@84.724,57.15 82.197,57.15 ; S267.2@89.487,19.05 85.852,19.05 84.9,18.098 ; S281.2@103.775,0 96.774,0 92.519,4.255 89.09,4.255 86.36,6.985 86.36,10.795 82.677,14.478 82.677,15.875 84.9,18.098 ; 82.197,57.15 75.057,50.01 75.057,43.005 S253.2@79.962,38.1 75.438,33.576 75.438,27.559 84.9,18.098
  Bottom Layer w0.35: v2(6.604,88.011) 7.874,86.741 8.366,86.741 8.804,86.303 48.095,86.303 49.901,84.497 53.493,84.497 55.299,86.303 84.131,86.303 v2(85.725,84.709)
col4: R415.1 S204.2 S220.2 S237.2 S254.2 S268.2 S282.2 U402.2 | length 224.1
  Top Layer w0.35: U402.2@-4.699,86.429 -4.699,86.854 -3.474,88.079 5.012,88.079 v2@6.413,86.677 ; S204.2@58.15,104.775 60.579,104.775 65.024,100.33 v2(65.024,83.947) 72.771,76.2 ; S254.2@60.912,38.1 59.055,38.1 ; S220.2@75.199,76.2 72.771,76.2 ; S282.2@79.962,0 72.801,0 72.263,0 65.532,6.731 65.532,14.145 S268.2@70.437,19.05 63.96,25.527 58.801,25.527 56.007,28.321 56.007,35.052 59.055,38.1 ; 59.055,38.1 56.642,40.513 56.642,48.26 65.532,57.15 S237.2@65.674,57.15 62.103,60.721 62.103,65.532 72.771,76.2
  Bottom Layer w0.35: v2(6.35,86.614) 7.211,85.753 47.867,85.753 49.673,83.947 53.721,83.947 55.527,85.753 63.472,85.753 64.776,84.449 64.776,84.371 65.024,84.123 v2(65.024,83.947)
col5: R414.1 S205.2 S221.2 S238.2 S255.2 S269.2 U402.5 | length 183.7
  Top Layer w0.35: U402.5@-0.889,86.429 -0.889,86.854 -0.214,87.529 3.848,87.529 v2@4.318,87.058 ; S205.2@39.1,104.775 46.863,104.775 49.276,102.362 49.276,100.203 58.547,90.932 58.547,87.376 55.118,83.947 53.213,83.947 50.927,81.661 50.927,79.629 54.356,76.2 ; S269.2@51.387,19.05 45.974,19.05 37.084,27.94 37.084,33.322 S255.2@41.862,38.1 37.338,42.624 37.338,47.864 S238.2@46.624,57.15 43.053,60.721 43.053,64.897 54.356,76.2 ; S221.2@56.149,76.2 54.356,76.2
  Bottom Layer w0.35: v2(4.318,87.122) 4.318,86.995 6.11,85.203 47.639,85.203 v2(50.927,81.915)
col6: R409.1 S206.2 S222.2 S239.2 S256.2 S270.2 S283.2 U402.13 | length 177.7
  Top Layer w0.35: U402.13@-2.159,91.879 -2.159,90.484 -1.954,90.279 3.556,90.279 ; S206.2@8.494,104.775 8.471,104.751 7.469,104.751 4.572,101.854 4.572,91.295 3.556,90.279 ; v2(27.305,81.153) 30.226,78.232 35.067,78.232 S222.2@37.099,76.2 28.971,68.072 25.273,68.072 21.463,64.262 21.463,60.071 24.384,57.15 ; v2(27.305,84.328) 25.539,86.094 19.443,86.094 15.258,90.279 3.556,90.279 ; S239.2@27.574,57.15 24.384,57.15 ; S270.2@32.337,19.05 30.861,19.05 29.464,17.653 ; S283.2@37.132,0 31.877,0 26.162,5.715 26.162,14.351 29.464,17.653 ; 24.384,57.15 18.161,50.927 18.161,42.751 S256.2@22.812,38.1 18.923,34.211 18.923,28.194 29.464,17.653
  Bottom Layer w0.35: v2(27.305,81.153) v2(27.305,84.328)
col7: R412.1 S207.2 S223.2 S240.2 S257.2 S271.2 U402.12 | length 125.8
  Top Layer w0.35: S207.2@-8.525,104.775 -8.525,103.902 v2(-1.651,97.028) ; v2(-1.651,93.275) -1.527,93.151 -1.33,93.151 -0.919,92.74 -0.919,91.909 U402.12@-0.889,91.879 ; v2(11.557,80.137) 15.494,76.2 15.621,76.2 ; S271.2@13.287,19.05 8.128,19.05 -1.016,28.194 -1.016,33.323 1.266,35.605 S257.2@3.762,38.1 -0.381,42.243 -0.381,48.245 S240.2@8.524,57.15 4.064,61.61 4.064,64.643 15.621,76.2 ; S223.2@18.049,76.2 15.621,76.2
  Bottom Layer w0.35: v2(-1.651,97.028) -1.651,93.337 v2(-1.651,93.275) -1.651,88.519 1.778,85.09 3.302,85.09 8.255,80.137 v2(11.557,80.137)
col8: R416.1 S208.2 S224.2 S241.2 S258.2 S272.2 S284.2 U402.4 | length 156.8
  Top Layer w0.35: S208.2@-27.575,104.775 v2(-19.884,97.083) ; v2(-7.81,79.692) -4.318,76.2 ; S272.2@-5.763,19.05 -8.382,19.05 -9.461,17.97 ; v2@-2.207,85.296 -2.207,86.381 U402.4@-2.159,86.429 ; S284.2@-1,0 -4.318,0 -12.319,8.001 -12.319,15.113 -9.461,17.97 ; S224.2@-1.001,76.2 -4.318,76.2 ; -9.461,17.97 -18.796,27.305 -18.796,34.592 S258.2@-15.288,38.1 -19.685,42.497 -19.685,47.991 S241.2@-10.526,57.15 -14.859,61.483 -14.859,65.659 -4.318,76.2
  Bottom Layer w0.35: v2(-19.884,97.083) -19.884,91.766 v2(-7.81,79.692) -6.985,80.518 -6.985,82.931 -5.016,84.9 v2(-2.476,84.9)
col9: R406.1 S209.2 S225.2 S242.2 S259.2 S273.2 U401.5 | length 142.8
  Top Layer w0.35: S209.2@-46.625,104.775 -41.41,99.56 -41.41,91.567 -40.013,90.17 -33.909,90.17 -33.274,89.535 -33.274,83.82 -32.258,82.804 v2(-28.575,82.804) ; S259.2@-34.338,38.1 -35.433,38.1 ; S242.2@-29.576,57.15 -29.651,57.226 -30.249,57.226 ; S273.2@-24.813,19.05 -30.226,19.05 -38.608,27.432 -38.608,34.925 -35.433,38.1 ; S225.2@-20.051,76.2 -21.971,76.2 ; U401.5@-16.256,88.911 -16.304,88.863 -16.304,87.946 -18.089,86.161 -24.71,86.161 -27.946,82.925 -28.454,82.925 v2(-28.575,82.804) ; -35.433,38.1 -39.243,41.91 -39.243,48.232 -30.249,57.226 ; -30.249,57.226 -33.98,60.956 -33.98,64.191 -21.971,76.2 ; v2(-28.575,82.804) -21.971,76.2
col10: R403.1 S210.2 S226.2 S243.2 S260.2 S274.2 S285.2 U401.15 | length 204.6
  Top Layer w0.35: S210.2@-75.2,104.775 -69.977,104.775 -65.532,100.33 -65.532,90.551 v2(-63.627,88.646) -53.848,88.646 -41.402,76.2 ; S274.2@-43.863,19.05 -45.593,19.05 ; S285.2@-39.1,0 -42.672,0 -50.8,8.128 -50.8,13.843 -45.593,19.05 ; S226.2@-39.101,76.2 -41.402,76.2 ; v2(-24.003,93.599) -23.827,93.599 -23.488,93.26 -20.742,93.26 -20.066,93.936 U401.15@-20.066,94.361 ; -45.593,19.05 -56.261,29.718 -56.261,35.227 S260.2@-53.388,38.1 -57.531,42.243 -57.531,48.245 S243.2@-48.626,57.15 -52.324,60.848 -52.324,65.278 -41.402,76.2
  Bottom Layer w0.35: v2(-63.627,88.646) -63.451,88.646 -62.941,88.136 -30.863,88.136 -25.457,93.542 -24.06,93.542 v2(-24.003,93.599)
col11: R402.1 S211.2 S227.2 S244.2 S261.2 S275.2 U401.14 | length 189.1
  Top Layer w0.35: S211.2@-94.25,104.775 -89.535,100.06 -89.535,90.805 -88.011,89.281 -72.009,89.281 v2(-70.739,88.011) -66.675,83.947 -66.675,79.248 -63.627,76.2 ; S275.2@-62.913,19.05 -66.167,19.05 -76.708,29.591 -76.708,33.83 S261.2@-72.438,38.1 -76.581,42.243 -76.581,48.245 S244.2@-67.676,57.15 -67.676,57.262 -72.771,62.357 -72.771,64.008 -66.675,70.104 -66.675,73.152 -63.627,76.2 ; S227.2@-58.151,76.2 -63.627,76.2 ; v2(-24.003,92.202) -23.981,92.202 -23.473,92.71 -20.022,92.71 -18.796,93.936 U401.14@-18.796,94.361
  Bottom Layer w0.35: v2(-70.739,88.011) -70.656,88.011 -70.231,87.586 -30.635,87.586 -26.084,92.137 -24.068,92.137 v2(-24.003,92.202)
col12: R401.1 S212.2 S228.2 S245.2 S262.2 S276.2 S286.2 U401.13 | length 232.1
  Top Layer w0.35: S212.2@-113.3,104.775 -108.712,100.187 -108.712,94.869 -104.521,90.678 -93.726,90.678 v2(-90.551,87.503) -85.852,82.804 -85.852,81.026 -81.026,76.2 ; S286.2@-81.963,0 -84.709,0 -89.154,4.445 -89.154,13.97 -84.074,19.05 ; S276.2@-81.963,19.05 -84.074,19.05 ; S228.2@-77.201,76.2 -81.026,76.2 ; v2(-25.908,89.281) -25.885,89.304 -25.182,89.304 -22.326,92.16 -19.302,92.16 -17.526,93.936 U401.13@-17.526,94.361 ; -84.074,19.05 -96.012,30.988 -96.012,33.576 S262.2@-91.488,38.1 -95.25,41.862 -95.25,48.626 S245.2@-86.726,57.15 -91.821,62.245 -91.821,65.405 -81.026,76.2
  Bottom Layer w0.35: v2(-90.551,87.503) -90.51,87.503 -90.043,87.036 -30.407,87.036 -28.162,89.281 v2(-25.908,89.281)
col13: R404.1 S213.2 S229.2 S246.2 S263.2 S263_2.2 S277.2 S277_2.2 S287.2 U401.12 | length 304.1
  Top Layer w0.35: S213.2@-132.35,104.775 -128.27,104.775 -123.825,100.33 -123.825,91.059 -123.317,90.551 -114.808,90.551 -104.14,79.883 -104.14,77.724 -102.616,76.2 ; S263_2.2@-122.451,38.1 -127.889,32.662 -127.889,29.591 -126.111,27.813 -107.061,27.813 ; S263.2@-108.544,38.1 -106.152,40.493 ; S277.2@-107.056,20.05 -107.056,27.808 -107.061,27.813 ; S246.2@-105.776,57.15 -108.839,57.15 ; S287.2@-103.775,0 -98.933,0 -95.25,3.683 -95.25,23.495 -101.727,29.972 ; S229.2@-96.251,76.2 -102.616,76.2 ; v2(-24.257,88.9) -24.158,88.999 -24.158,89.55 -22.098,91.61 -18.582,91.61 -16.256,93.936 U401.12@-16.256,94.361 ; -108.839,57.15 -111.633,59.944 -111.633,64.008 -104.775,70.866 -104.775,74.041 -102.616,76.2 ; -108.839,57.15 -110.499,55.49 -110.499,51.317 -103.759,44.577 -103.759,42.885 -106.152,40.493 ; -107.061,27.813 -103.886,27.813 -101.727,29.972 ; -106.152,40.493 -99.949,34.29 -99.949,31.75 -101.727,29.972
  Bottom Layer w0.35: v2(-110.998,86.868) -110.822,86.868 -110.44,86.486 -30.18,86.486 -28.401,88.265 -24.892,88.265 v2(-24.257,88.9)
col14: R405.1 S214.2 S230.2 S247.2 S247_2.2 S264.2 S264_2.2 S278.2 S288.2 U401.1 | length 330.8
  Top Layer w0.35: S214.2@-156.162,104.775 -153.035,104.775 -145.415,97.155 -145.415,94.234 -145.415,86.487 -145.415,83.312 -142.24,80.137 ; S278.2@-134.351,19.05 -138.176,19.05 ; S264.2@-134.351,76.2 -139.446,76.2 ; S247_2.2@-130.969,46.625 -130.969,44.037 -134.112,40.894 -139.827,40.894 ; S288.2@-129.588,0 -138.938,0 -143.129,4.191 -143.129,14.097 -138.176,19.05 ; S247.2@-128.588,58.15 -128.588,62.04 -130.175,63.627 -134.366,63.627 -136.207,61.785 ; S264_2.2@-122.825,76.2 -119.761,79.264 -119.761,83.439 -121.666,85.344 -137.033,85.344 -142.24,80.137 ; v2(-23.114,88.138) -22.938,88.138 -22.611,87.811 -22.298,87.811 -21.671,88.438 -21.451,88.438 -21.336,88.554 U401.1@-21.336,88.911 ; -142.24,80.137 -142.24,78.994 -139.446,76.2 ; -139.827,40.894 -141.351,42.418 -141.351,56.642 -136.207,61.785 ; -139.827,40.894 -142.621,38.1 -142.621,23.495 -138.176,19.05 ; -139.446,76.2 -142.24,73.406 -142.24,67.691 -136.334,61.785 -136.207,61.785
  Bottom Layer w0.35: v2(-145.542,86.487) -145.458,86.487 -144.907,85.936 -29.952,85.936 -28.173,87.715 -24.205,87.715 -23.823,88.097 -23.155,88.097 v2(-23.114,88.138)
col15: R407.1 S215.2 S231.2 S248.2 S249.2 S279.2 S289.2 U401.2 | length 299.5
  Top Layer w0.35: S279.2@-175.213,19.05 -169.672,19.05 ; S249.2@-175.213,57.15 -172.339,57.15 ; S215.2@-175.213,104.775 -172.212,104.775 -166.751,99.314 v2(-166.751,86.233) -166.751,80.391 -162.56,76.2 ; S289.2@-158.163,0 -163.068,0 -166.497,3.429 -166.497,15.875 -169.672,19.05 ; S248.2@-158.163,57.15 -160.909,57.15 -166.624,62.865 ; S231.2@-158.163,76.2 -162.56,76.2 ; v2(-27.405,86.473) -27.358,86.52 -26.387,86.52 -25.646,87.261 -21.336,87.261 -20.066,88.531 U401.2@-20.066,88.911 ; -172.339,57.15 -166.624,51.435 -166.624,22.098 -169.672,19.05 ; -172.339,57.15 -166.624,62.865 ; -166.624,62.865 -166.624,72.136 -162.56,76.2
  Bottom Layer w0.35: v2(-166.751,86.233) -165.904,85.386 -29.724,85.386 -28.535,86.574 -27.507,86.574 v2(-27.405,86.473)
col16: R408.1 S216.2 S232.2 S233.2 S250.2 S290.2 S291.2 U401.4 | length 320.4
  Top Layer w0.35: S291.2@-194.263,0 -187.198,7.065 ; S250.2@-194.263,57.15 -190.754,57.15 ; S233.2@-194.263,76.2 -189.738,76.2 ; S216.2@-194.263,104.775 -185.674,96.186 v2(-185.674,84.836) -185.674,80.264 ; S290.2@-177.213,0 -180.133,0 -187.198,7.065 ; S232.2@-177.213,76.2 -181.61,76.2 -185.674,80.264 ; v2(-26.463,85.645) -26.339,85.77 -25.99,85.77 -25.049,86.711 -18.476,86.711 -17.526,87.661 U401.4@-17.526,88.911 ; -190.754,57.15 -185.801,62.103 -185.801,72.263 -189.738,76.2 ; -190.754,57.15 -187.198,53.594 -187.198,7.065 ; -189.738,76.2 -185.674,80.264
  Bottom Layer w0.35: v2(-185.674,84.836) -184.912,85.598 -167.353,85.598 -166.591,84.836 -29.464,84.836 -28.702,85.598 -26.51,85.598 v2(-26.463,85.645)
D_N: CON304.2 D301.4 U301.32 | length 20.3
  Top Layer w0.152: CON304.2@25.344,91.24 25.819,91.24 26.042,91.016 26.042,91.007 26.132,90.918 26.416,90.918 26.492,90.918 26.492,91.072 27.153,91.072 27.153,90.918 27.813,90.918 30.226,90.918 ; D301.4@30.165,92.109 30.165,90.978 30.226,90.918 ; U301.32@42.147,88.197 41.712,87.762 41.712,87.66 41.428,87.376 35.936,87.376 35.072,88.24 33.172,88.24 30.494,90.918 30.226,90.918
D_P: CON304.3 D301.3 U301.33 | length 20.3
  Top Layer w0.152: CON304.3@25.344,90.24 25.819,90.24 26.042,90.464 26.042,90.473 26.132,90.562 30.099,90.562 ; D301.3@30.165,89.359 30.165,90.496 30.099,90.562 ; U301.33@42.5,87.843 42.066,87.409 41.964,87.409 41.575,87.02 35.789,87.02 34.925,87.884 33.025,87.884 30.347,90.562 30.099,90.562
DISCHARGE: C404.2 U301.38 U401.3 U402.3 U403.3 | length 79.9
  Top Layer w0.254: v1(45.974,84.455) 46.531,85.012 46.531,86.594 46.001,87.124 U301.38@46.001,87.136
  Top Layer w0.35: U401.3@-18.796,88.911 -18.796,89.336 -16.607,91.525 -12.446,91.525 -10.16,89.239 -10.16,87.249 -7.62,84.709 -3.81,84.709 ; U402.3@-3.429,86.429 -3.429,85.09 -3.81,84.709 ; C404.2@29.972,85.202 29.972,84.455 29.845,84.328 ; U403.3@35.814,85.54 35.814,85.047 35.689,84.922 35.689,84.838 v1(35.179,84.328) 29.845,84.328 ; -3.81,84.709 -3.685,84.709 -3.001,84.025 -1.954,84.025 -1.143,84.836 14.478,84.836 15.186,85.544 24.852,85.544 26.943,83.453 27.545,83.453 27.559,83.439 28.956,83.439 29.845,84.328
  Bottom Layer w0.254: v1(35.179,84.328) 35.179,84.379 35.501,84.701 45.652,84.701 45.898,84.455 v1(45.974,84.455)